# EAGLE board Button Control over LEDs PCB (EAGLE 9.7.0)
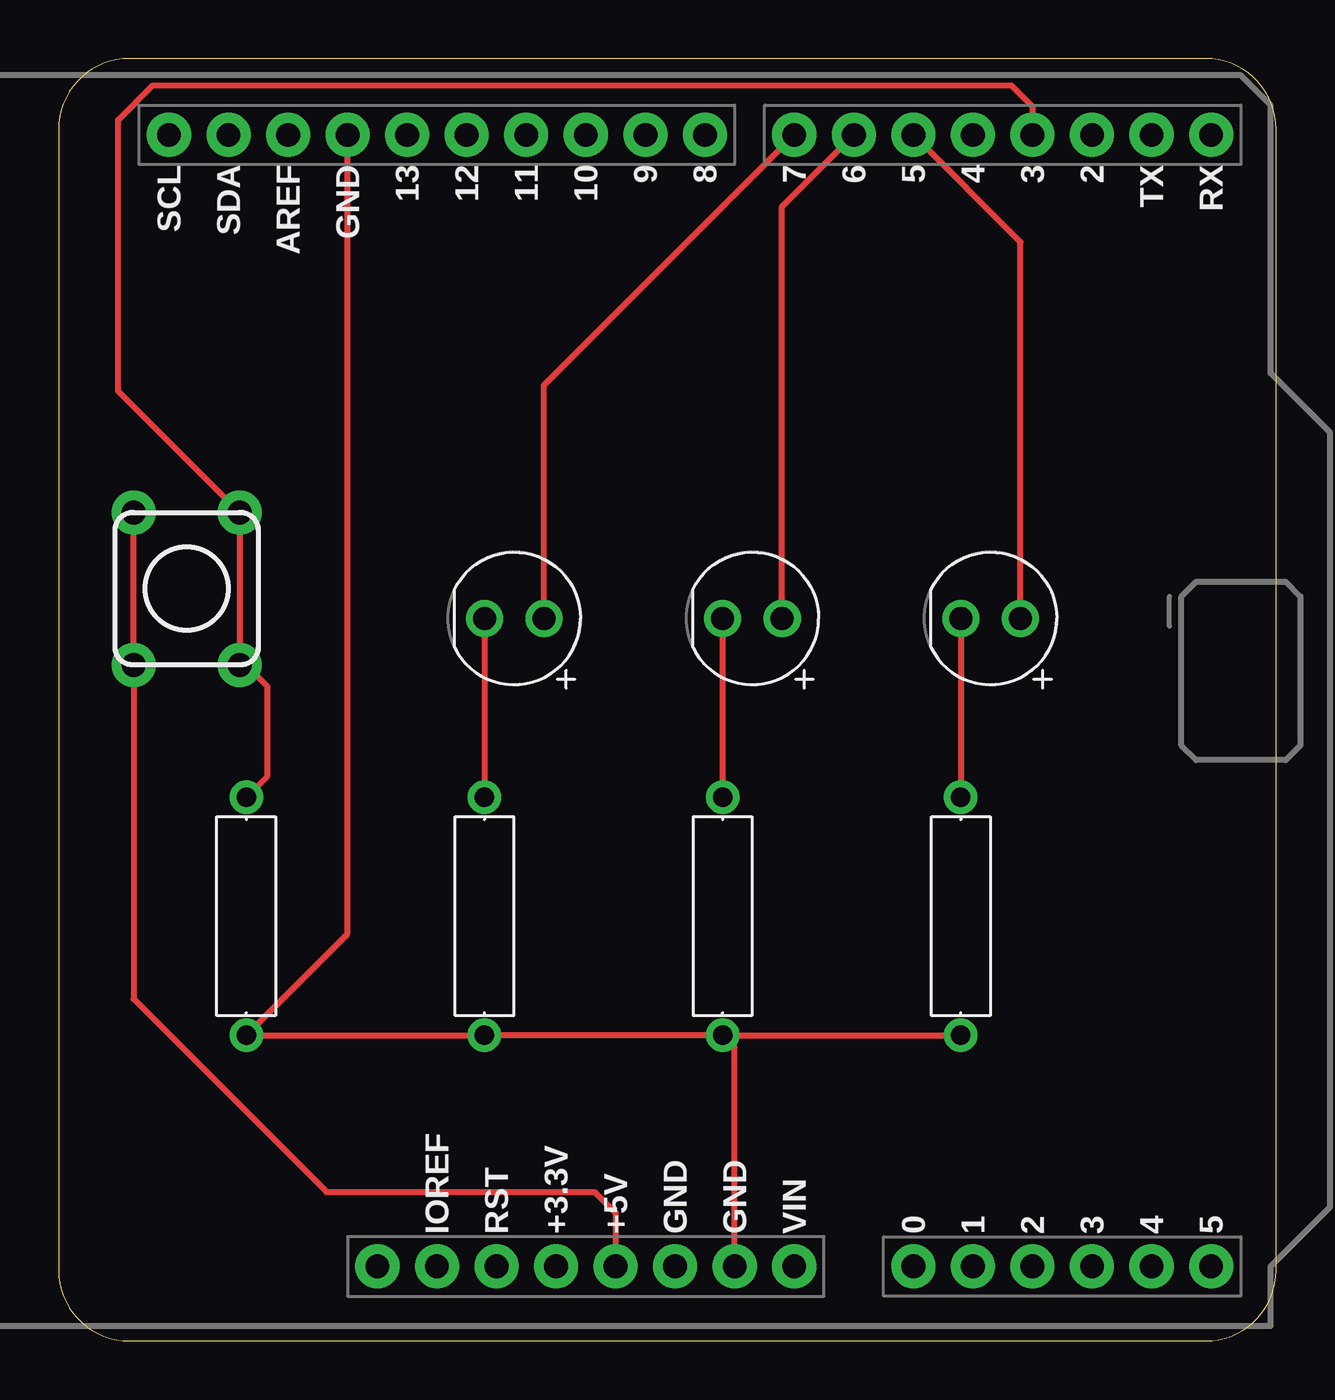
[diagram p0: board, top side]

Size 51.92 x 54.69 mm. Coordinates in mm from the lower left corner, seen from the top.
Outline: 51.92,51.69 arc90 48.92,54.69 3,54.69 arc90 0,51.69 0,3 arc90 3,0 48.92,0 arc90 51.92,3 51.92,51.69
Copper layers (1*16): Top 0.035mm / dielectric 1.5mm / Bottom 0.035mm
Design rules "default": minimum track width 6mil, minimum drill 0.35mm, track to track 6mil, track to pad 6mil, pad to pad 6mil, via to via 6mil, smd to smd 6mil, copper to edge 40mil, drill to drill 6mil, minimum pad ring 10mil, minimum via ring 8mil, stop-mask expansion 4mil, vias tented up to drill 0mil, thermal gap 10mil

## Footprints (pad centres in the part's own frame; a part is rotated, then mirrored left to right if it is on the bottom)
LEDRD254W60D565H860B = drill 0.981 pad 1.581: 1 -1.27,0; 2 1.27,0
RESAD1016W63L850D250B = drill 0.83 pad 1.43: 1 -5.08,0; 2 5.08,0
SWITCH-MOMENTARY-PTH-6.5MM = drill 1.016 pad 1.88: 1 -3.251,2.261; 2 3.251,2.261; 3 -3.251,-2.261; 4 3.251,-2.261
ARDUINO-UNO-R3-SHIELD = drill 1.016 pad 1.88: 3.3V 24.13,-2.54; 5V 24.13,0; A0 24.13,12.7; A1 24.13,15.24; A2 24.13,17.78; A3 24.13,20.32; A4 24.13,22.86; A5 24.13,25.4; AREF -24.13,-13.97; D2 -24.13,20.32; D3 -24.13,17.78; D4 -24.13,15.24; D5 -24.13,12.7; D6 -24.13,10.16; D7 -24.13,7.62; D8 -24.13,3.81; D9 -24.13,1.27; D10 -24.13,-1.27; D11 -24.13,-3.81; D12 -24.13,-6.35; D13 -24.13,-8.89; GND@0 24.13,2.54; GND@1 24.13,5.08; GND@2 -24.13,-11.43; IOREF 24.13,-7.62; NC 24.13,-10.16; RES 24.13,-5.08; RX -24.13,25.4; SCL -24.13,-19.05; SDA -24.13,-16.51; TX -24.13,22.86; VIN 24.13,7.62

## Placement (x,y rotation side)
D1  RED  [LEDRD254W60D565H860B]  29.59,30.81 180 top
D2  RED  [LEDRD254W60D565H860B]  39.75,30.81 180 top
D3  RED  [LEDRD254W60D565H860B]  19.43,30.81 180 top
R1  1k  [RESAD1016W63L850D250B]  28.32,18.11 90 top
R2  1k  [RESAD1016W63L850D250B]  38.48,18.11 90 top
R3  1k  [RESAD1016W63L850D250B]  18.16,18.11 90 top
R4  1k  [RESAD1016W63L850D250B]  8,18.11 90 top
S1  SWITCH_MOMENTARY  [SWITCH-MOMENTARY-PTH-6.5MM]  5.46,32.08 90 top
U1  ARDUINO-UNO-R3-SHIELD  [ARDUINO-UNO-R3-SHIELD]  23.75,27.3 270 top

## Library data of the parts
D1-D3 = Tinkercad; CATEGORY: Opto-Electronic; SUB-CATEGORY: LED; VALUE: LED_RED
R1-R4 S1 U1 = Tinkercad

## Nets
D1_C: D1.2 R1.2
D2_C: D2.2 R2.2
D3_C: D3.2 R3.2
U1_5V: S1.1 S1.2 U1.5V
U1_D3: R4.2 S1.3 S1.4 U1.D3
U1_D5: D2.1 U1.D5
U1_D6: D1.1 U1.D6
U1_D7: D3.1 U1.D7
U1_GND: R1.1 R2.1 R3.1 R4.1 U1.GND@1 U1.GND@2

## Tracks (layer width: path | path; a pad name or v marks a point on that pad's centre or on a via)
D1_C
  Top 0.254: D1.2 R1.2
D2_C
  Top 0.254: D2.2 R2.2
D3_C
  Top 0.254: D3.2 R3.2
U1_5V
  Top 0.254: S1.2 S1.1 3.2,14.58 11.43,6.35 22.86,6.35 23.75,5.46 U1.5V
U1_D3
  Top 0.254: U1.D3 41.54,52.65 40.64,53.55 4.02,53.55 2.54,52.07 2.54,40.52 S1.4 S1.3 8,28.83 8.89,27.94 8.89,24.08 R4.2
U1_D5
  Top 0.254: D2.1 41.02,46.87 U1.D5
U1_D6
  Top 0.254: D1.1 30.86,48.38 U1.D6
U1_D7
  Top 0.254: D3.1 20.7,40.76 U1.D7
U1_GND
  Top 0.254: R1.1 R3.1 R4.1 12.32,17.36 U1.GND@2 | R1.1 R2.1 | U1.GND@1 28.84,12.52 R1.1